# EAGLE board CremeDeLaBoard (EAGLE 9.2.2)
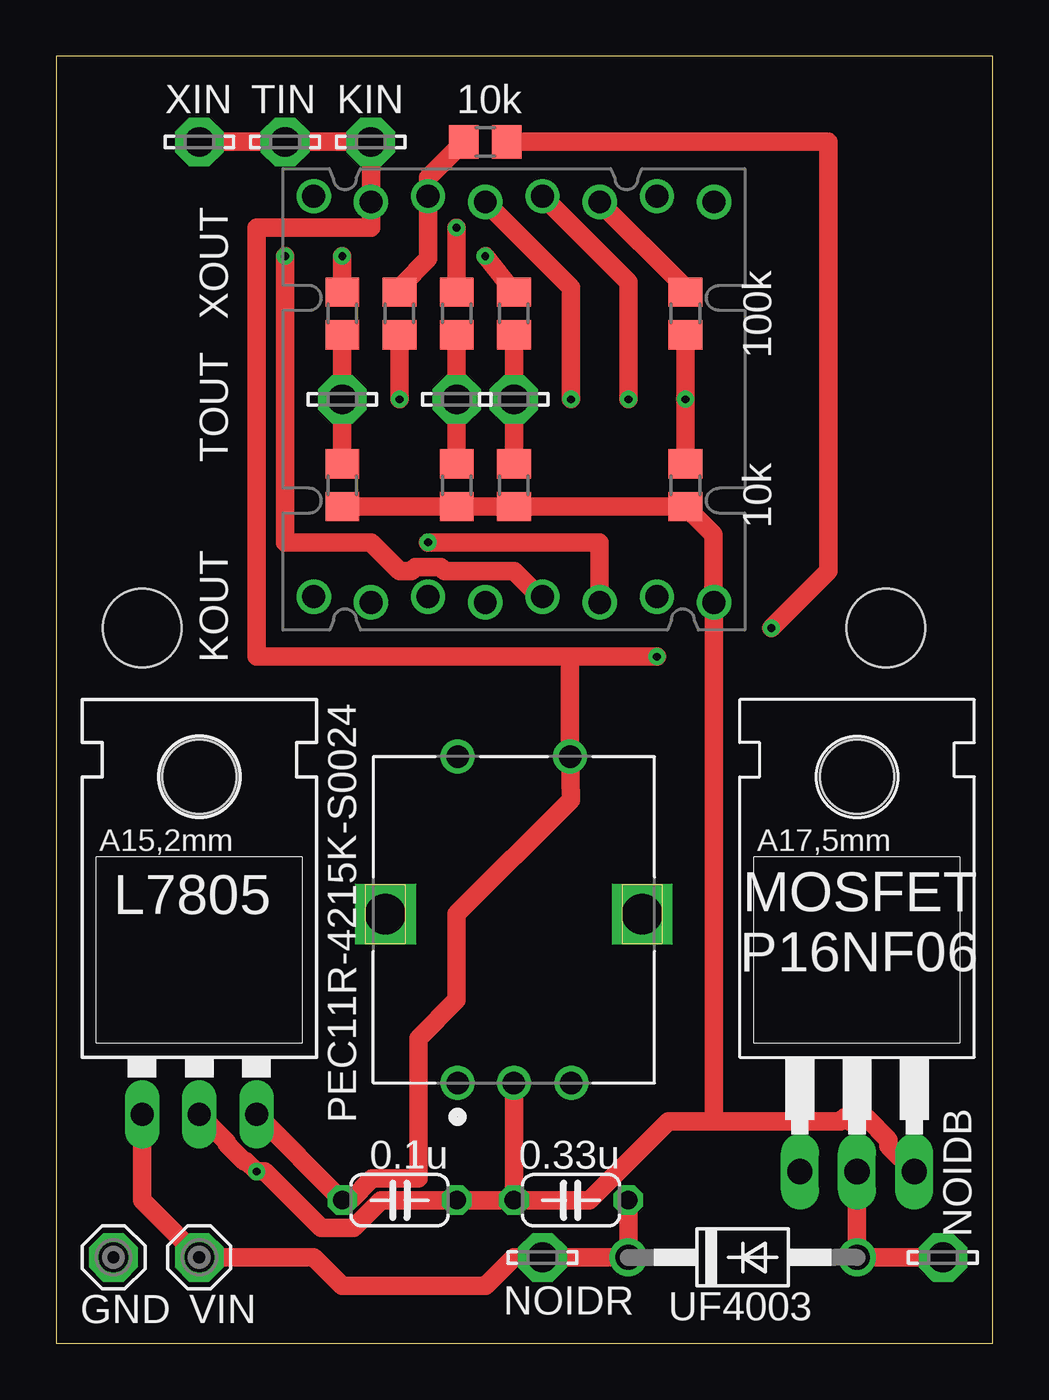
[diagram p0: board, top side]
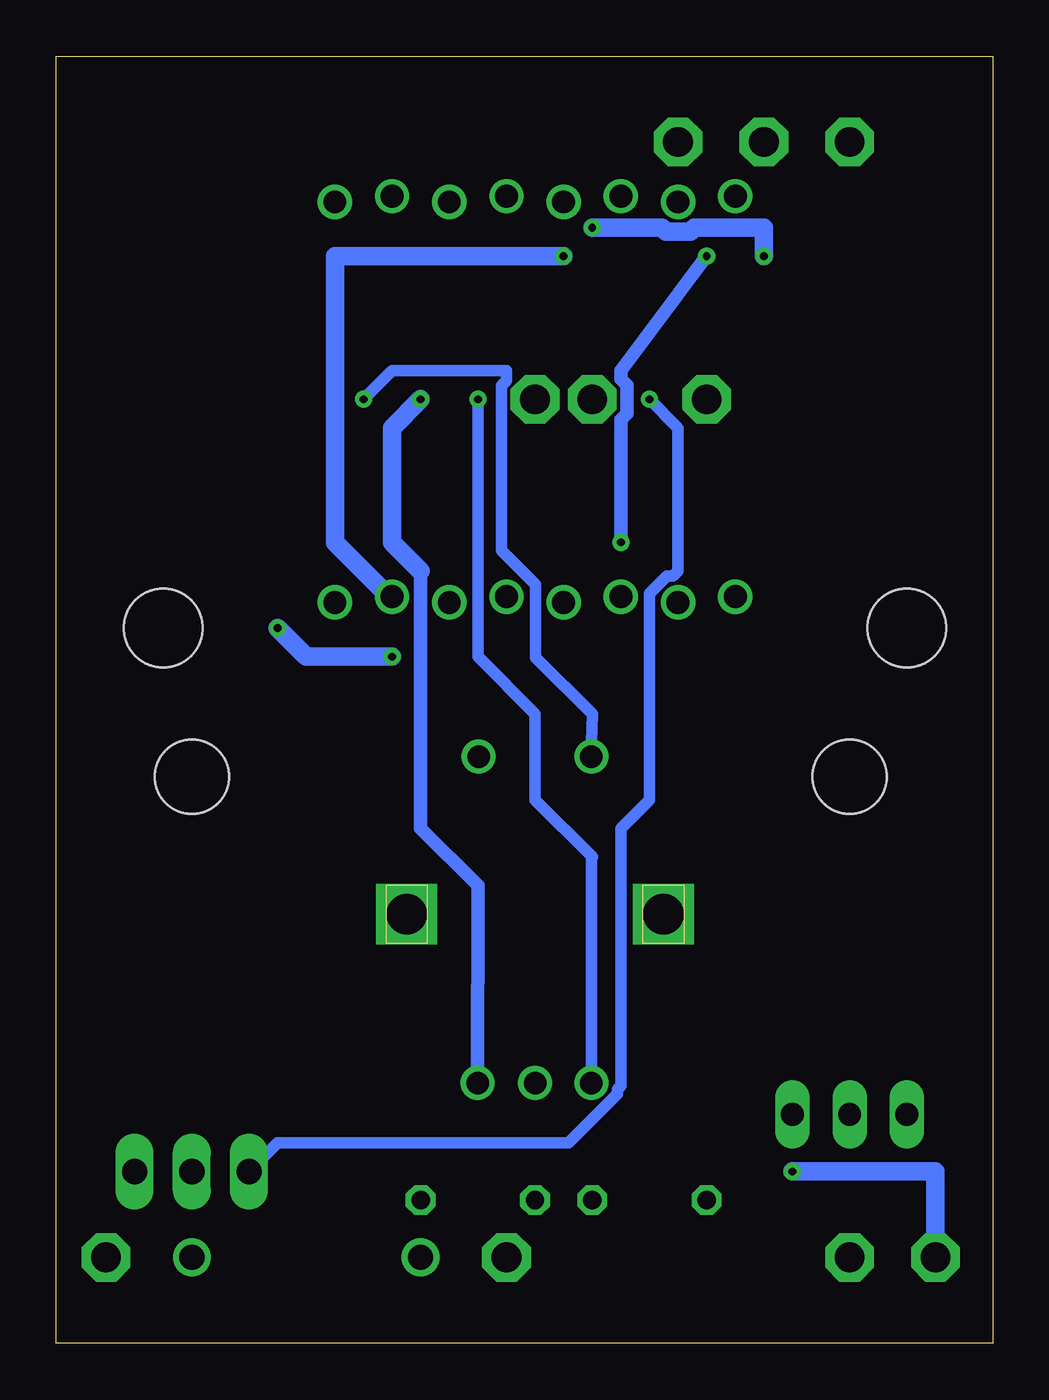
[diagram p1: board, bottom side, seen from below]

Size 41.58 x 57.14 mm. Coordinates in mm from the lower left corner, seen from the top.
Outline: 0,0 41.58,0 41.58,57.14 0,57.14 0,0
Copper layers (1*16): Top 0.035mm / dielectric 1.5mm / Bottom 0.035mm
Design rules "default": minimum track width 6mil, minimum drill 0.35mm, track to track 6mil, track to pad 6mil, pad to pad 6mil, via to via 6mil, smd to smd 6mil, copper to edge 40mil, drill to drill 6mil, minimum pad ring 10mil, minimum via ring 8mil, stop-mask expansion 4mil, vias tented up to drill 0mil, thermal gap 10mil
Holes 3.5 mm at 3.81,31.75 36.83,31.75

## Footprints (pad centres in the part's own frame; a part is rotated, then mirrored left to right if it is on the bottom)
C050-024X044 = drill 0.813 octagon: 1 -2.54,0; 2 2.54,0
DO41-10 = drill 1.118: A 5.08,0; C -5.08,0
PEC11R-4215K-S0024 = drill 1: 1 -2.5,7; 2 2.5,7; A -2.5,-7.5; B 2.55,-7.5; C 0,-7.5 | drill 1.8 square: M1 -5.7,0; M2 5.7,0
R0805 = smd 1.3 x 1.5: 1 -0.95,0; 2 0.95,0
SE13 = drill 1.321 pad 2.159 octagon: MP 0,0
LSP13 = drill 1.321 pad 2.159 octagon: MP 0,0
78XXL = drill 1.016 long: GND 0,-3.81; IN -2.54,-3.81; OUT 2.54,-3.81 | hole 3.302: 0,11.176
MV-DIP16 = drill 1.016: 1 -8.89,-8.763; 2 -6.35,-9.017; 3 -3.81,-8.763; 4 -1.27,-9.017; 5 1.27,-8.763; 6 3.81,-9.017; 7 6.35,-8.763; 8 8.89,-9.017; 9 8.89,8.763; 10 6.35,9.017; 11 3.81,8.763; 12 1.27,9.017; 13 -1.27,8.763; 14 -3.81,9.017; 15 -6.35,8.763; 16 -8.89,9.017
TO220 = drill 1.118 long: 1 -2.54,-6.35; 2 0,-6.35; 3 2.54,-6.35 | hole 3.302: 0,11.176

## Placement (x,y rotation side)
C1  0.33u  [C050-024X044]  22.86,6.35 180 top
C2  0.1u  [C050-024X044]  15.24,6.35 0 top
D1  UF4003  [DO41-10]  30.48,3.81 0 top
ENCODER  PEC11R-4215K-S0024  [PEC11R-4215K-S0024]  20.32,19.05 0 top
ENSRG  10k  [R0805]  27.94,38.1 90 top
GND  SE13  [SE13]  2.54,3.81 0 top
KDETR  10k  [R0805]  12.7,38.1 90 top
KIN  LSP13  [LSP13]  13.97,53.34 0 top
KOUT  LSP13  [LSP13]  12.7,41.91 0 top
L7805  5V  [78XXL]  6.35,13.97 0 top
MICROVIEW  MICROVIEW-16  [MV-DIP16]  20.32,41.91 0 top
MOSFET  P16NF06  [TO220]  35.56,13.97 0 top
MOSFETRG  10k  [R0805]  19.05,53.34 0 top
MOSFETRP  100k  [R0805]  15.24,45.72 90 top
NOIDB  LSP13  [LSP13]  39.37,3.81 180 top
NOIDR  LSP13  [LSP13]  21.59,3.81 180 top
R8  100k  [R0805]  27.94,45.72 90 top
R12  100k  [R0805]  20.32,45.72 270 top
R13  100k  [R0805]  12.7,45.72 270 top
R14  100k  [R0805]  17.78,45.72 270 top
TDETR  10k  [R0805]  17.78,38.1 90 top
TIN  LSP13  [LSP13]  10.16,53.34 0 top
TOUT  LSP13  [LSP13]  17.78,41.91 0 top
TRIGR  10k  [R0805]  20.32,38.1 90 top
VIN  SE13  [SE13]  6.35,3.81 90 top
XIN  LSP13  [LSP13]  6.35,53.34 0 top
XOUT  LSP13  [LSP13]  20.32,41.91 0 top

## Library data of the parts
C1 C2 = adafruit
D1 = diode
ENCODER = Encoders; CREATED_BY: PCBLayout.com; DIGIKEY_PARTNO: PEC11R-4215K-S0024-ND; MANUFACTURER: Bourns Inc.; MPN: PEC11R-4215K-S0024
ENSRG KDETR MOSFETRG MOSFETRP R8 R12-R14 TDETR TRIGR = rcl; SPICEPREFIX: R
GND KIN KOUT NOIDB NOIDR TIN TOUT VIN XIN XOUT = solpad
L7805 = tango
MICROVIEW = microView-temp
MOSFET = transistor-fet

## Nets
5V: C2.1 ENCODER.2 KIN.MP L7805.OUT MICROVIEW.15 MOSFETRG.2 TIN.MP XIN.MP
+12V: C1.1 D1.C L7805.IN NOIDR.MP VIN.MP
N$2: D1.A MOSFET.2 NOIDB.MP
N$3: ENCODER.1 ENSRG.2 R8.1
N$4: C1.2 C2.2 ENCODER.C ENSRG.1 GND.MP KDETR.1 L7805.GND MICROVIEW.8 MOSFET.3 TDETR.1 TRIGR.1
N$5: ENCODER.A MICROVIEW.13
N$6: MICROVIEW.14 MOSFETRG.1 MOSFETRP.2
N$8: R14.2 TDETR.2 TOUT.MP
N$10: MICROVIEW.11 R8.2
N$11: KDETR.2 KOUT.MP R13.2
N$12: R12.2 TRIGR.2 XOUT.MP
N$13: MOSFET.1 MOSFETRP.1
N$14: MICROVIEW.7 R12.1
N$15: MICROVIEW.6 R13.1
N$16: MICROVIEW.5 R14.1
N$17: ENCODER.B MICROVIEW.12

## Tracks (layer width: path | path; a pad name or v marks a point on that pad's centre or on a via)
5V  (via drill 0.35)
  Top 0.813: L7805.OUT C2.1 13.06,6.35 14.02,7.32 16.09,7.32 16.09,13.54 17.78,15.24 17.78,19.05 22.86,24.13 ENCODER.2 22.82,30.44 22.86,30.48 | XIN.MP TIN.MP KIN.MP MICROVIEW.15 13.97,49.53 8.89,49.53 8.89,30.48 22.86,30.48 | MOSFETRG.2 34.29,53.34 34.29,34.29 v31.75,31.75 | v26.67,30.48 22.86,30.48
  Bottom 0.813: v31.75,31.75 30.48,30.48 v26.67,30.48
+12V
  Top 0.813: L7805.IN 3.81,6.35 VIN.MP 11.43,3.81 12.7,2.54 19.05,2.54 20.32,3.81 NOIDR.MP D1.C C1.1
N$2
  Top 0.813: MOSFET.2 D1.A NOIDB.MP
N$3  (via drill 0.35)
  Top 0.813: ENSRG.2 v27.94,41.91 R8.1
  Bottom 0.152: 20.3,30.48 20.3,30.45 | 17.81,26.67 ENCODER.1
  Bottom 0.508: v27.94,41.91 26.67,43.18 21.59,43.18 21.59,42.74 21.81,42.52 21.81,35.2 20.3,33.68 20.3,30.48 | 20.3,30.45 17.78,27.94 17.81,26.67
N$4  (via drill 0.35)
  Top 0.152: MOSFET.3 37.91,7.62 | 35.12,9.53 34.99,10.02 34.92,10.32 | 29.18,33.01 MICROVIEW.8
  Top 0.813: MOSFET.3 36.96,8.76 36.96,9.04 35.98,10.02 34.99,10.02 34.83,9.86 29.21,9.86 | C1.2 23.68,6.35 27.18,9.86 29.21,9.86 | L7805.GND 7.57,8.94 7.57,8.85 8.34,8.08 8.43,8.08 v8.89,7.62 9.26,7.62 11.75,5.13 13.21,5.13 14.42,6.35 C2.2 C1.2 | MICROVIEW.8 29.21,9.86 | 29.18,33.01 29.18,35.91 ENSRG.1 TRIGR.1 TDETR.1 KDETR.1 | ENCODER.C C1.2
  Bottom 0.813: v8.89,7.62 2.54,7.62 GND.MP
N$5  (via drill 0.35)
  Top 0.813: MICROVIEW.13 22.86,46.86 v22.86,41.91
  Bottom 0.508: v22.86,41.91 22.86,30.48 20.32,27.94 20.32,24.13 17.78,21.59 17.82,21.55 ENCODER.A
N$6
  Top 0.152: 15.33,46.96 MOSFETRP.2
  Top 0.813: 15.33,46.96 16.51,48.15 MICROVIEW.14 16.51,51.75 MOSFETRG.1
N$8
  Top 0.152: 17.78,39.37 TDETR.2 | 17.78,44.45 R14.2
  Top 0.813: 17.78,44.45 TOUT.MP 17.78,39.37
N$10
  Top 0.152: 27.78,46.84 R8.2
  Top 0.813: MICROVIEW.11 27.78,47.02 27.78,46.84
N$11
  Top 0.152: 12.7,39.37 KDETR.2
  Top 0.813: R13.2 KOUT.MP 12.7,39.37
N$12
  Top 0.152: 20.32,44.45 R12.2
  Top 0.813: TRIGR.2 XOUT.MP 20.32,44.45
N$13  (via drill 0.35)
  Top 0.813: v15.24,41.91 MOSFETRP.1
  Bottom 0.508: v15.24,41.91 13.97,40.64 13.97,34.29 14.2,34.06 14.45,34.06 15.24,33.27 15.24,24.13 16.51,22.86 16.51,11.43 16.66,11.28 16.66,11.07 18.84,8.89 31.75,8.89 MOSFET.1
N$14  (via drill 0.35)
  Top 0.813: R12.1 v19.05,48.26
  Bottom 0.813: MICROVIEW.7 26.8,33.15 29.21,35.56 29.21,48.26 v19.05,48.26
N$15  (via drill 0.35)
  Top 0.152: R13.1 v12.7,48.26 | v16.51,35.56 24.13,35.56 MICROVIEW.6
  Top 0.813: MICROVIEW.6 24.13,35.56 v16.51,35.56 | R13.1 v12.7,48.26
  Bottom 0.61: v12.7,48.26 16.51,43.18 16.51,42.81 16.24,42.55 16.24,41.27 16.51,41.01 v16.51,35.56
N$16  (via drill 0.35)
  Top 0.152: 10.16,35.56 v10.16,48.26
  Top 0.813: R14.1 v17.78,49.53 | v10.16,48.26 10.16,35.56 13.97,35.56 15.24,34.29 15.79,34.29 15.96,34.47 17.06,34.47 17.23,34.29 20.32,34.29 21.46,33.15 MICROVIEW.5
  Bottom 0.152: v10.16,48.26 10.16,49.53
  Bottom 0.813: v10.16,48.26 10.16,49.53 13.24,49.53 13.42,49.35 14.52,49.35 14.7,49.53 v17.78,49.53
N$17  (via drill 0.35)
  Top 0.813: MICROVIEW.12 25.4,47.12 v25.4,41.91
  Bottom 0.61: ENCODER.B 22.86,20.32 25.4,22.86 25.4,34.29
  Bottom 0.813: v25.4,41.91 26.67,40.64 26.67,35.56 25.4,34.29

## Text on the board
tNames: 10k